# Allegro board CCR3_Slave_Bottom_Board_V1-0.brd
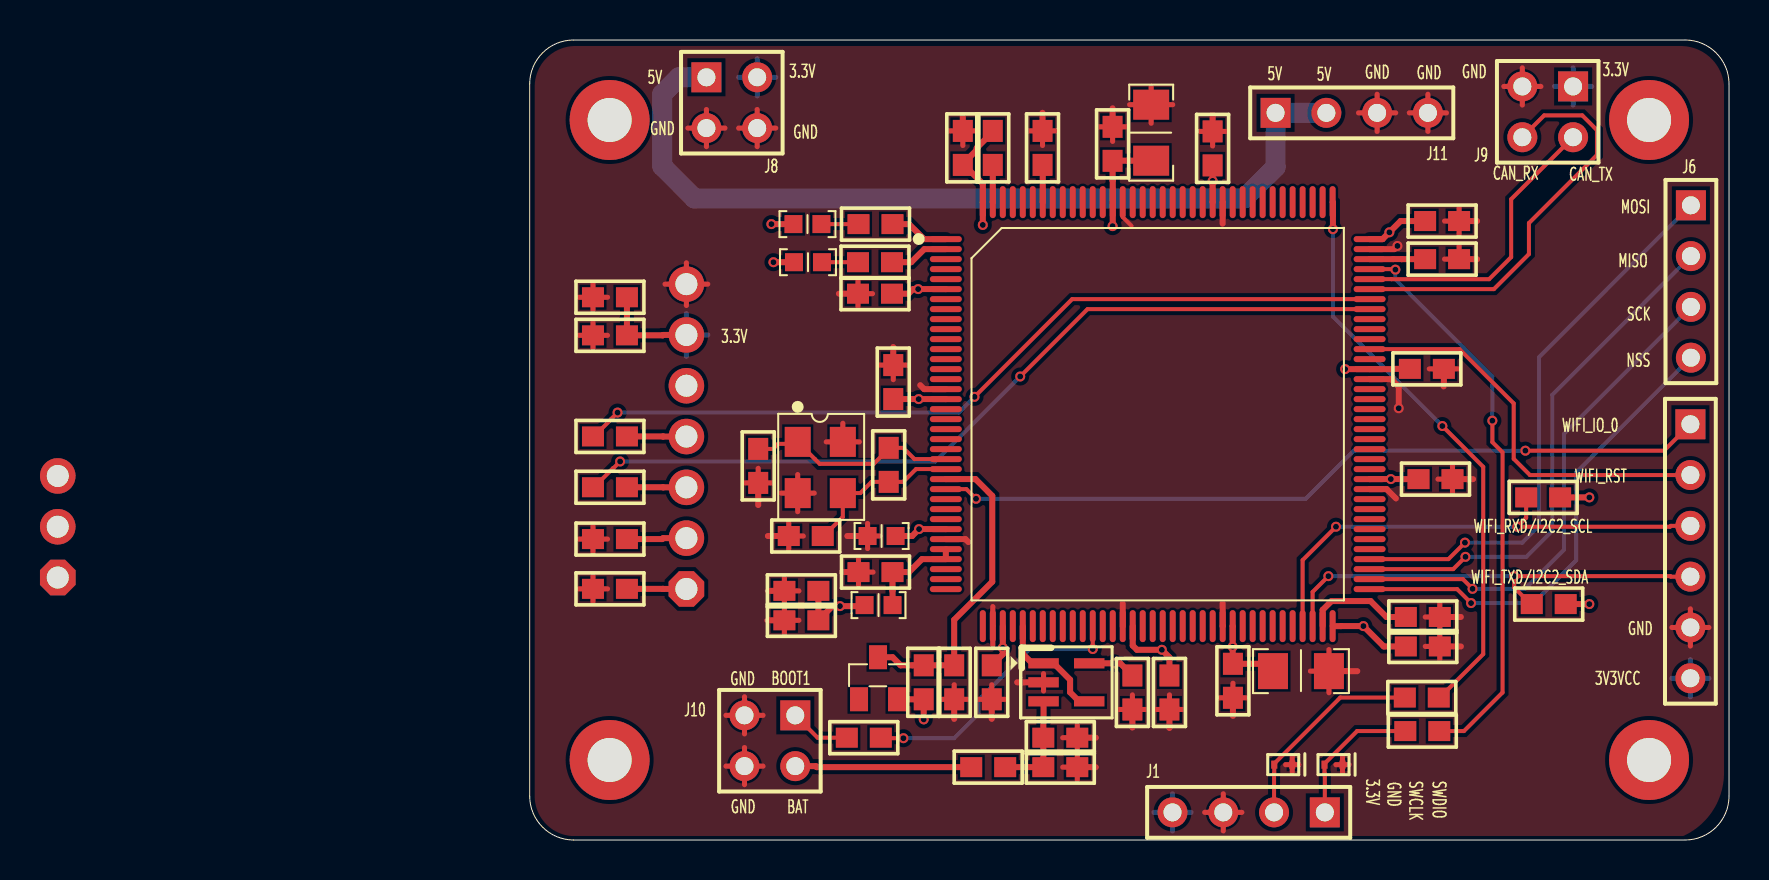
[diagram p0: board, top side]
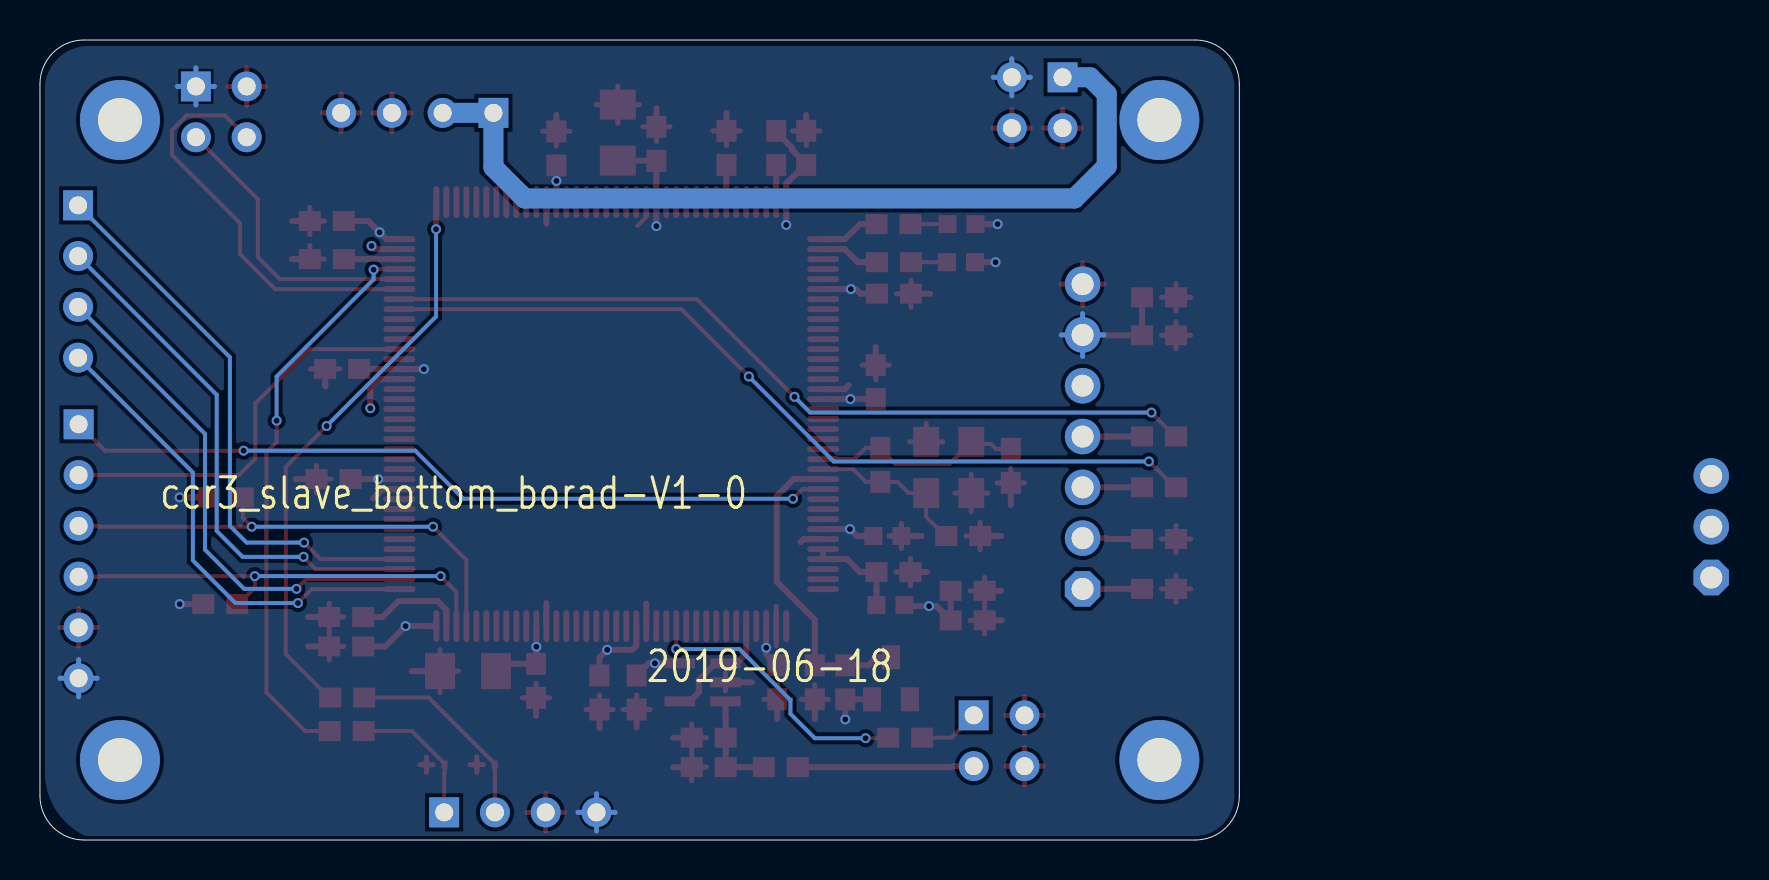
[diagram p1: board, bottom side, seen from below]

Outline 60 x 40 mm; copper layers: TOP, BOTTOM. Coordinates in mm from the lower left corner of the outline.
Outline path: 0,37.8 arc(0.64,39.36) 2.2,40 57.8,40 arc(59.36,39.36) 60,37.8 60,2.2 arc(59.36,0.64) 57.8,0 2.2,0 arc(0.64,0.64) 0,2.2 0,37.8

## Placement (name value [footprint] x y rotation side)
C1  100nF/50V  [C0603]  4.02 27.14 0 top
C2  10uF/25V  [C0603]  4.02 25.23 0 top
C3  270p/50V,10%  [C0603]  26.55 5.12 180 top
C18  10nF/16V  [C0603]  13.59 10.98 0 top
C19  2.2uF/16V  [C0603]  13.59 12.46 0 top
C25  10nF/16V  [C0603]  44.88 23.56 180 top
C26  10nF/16V  [C0603]  32.01 7.38 90 top
C27  10nF/16V  [C0603]  18.19 22.9 270 top
C28  100nF/16V  [C0603]  45.65 30.95 180 top
C29  100nF/16V  [C0603]  45.32 18.04 180 top
C30  100nF/16V  [C0603]  44.68 9.68 180 top
C31  100nF/16V  [C0603]  23.12 7.88 90 top
C32  100nF/16V  [C0603]  35.18 7.96 90 top
C33  100nF/16V  [C0603]  29.16 34.81 270 top
C34  100nF/16V  [C0603]  34.17 34.58 270 top
C35  100nF/16V  [C0603]  30.15 7.38 90 top
C36  10uF/25V  [RC1206]  39.99 8.44 180 top
C37  10uF/25V  [RC1206]  31.09 36.77 270 top
C38  10nF/16V  [RC0603]  16.9 15.2 0 top
C44  2.2uF/16V  [C0603]  21.24 7.88 90 top
C46  2.2uF/16V  [C0603]  21.67 34.61 270 top
C47  2.2uF/16V  [C0603]  44.68 11.15 180 top
C48  2.2uF/16V  [C0603]  45.65 29.04 180 top
C49  10nF/16V  [C0603]  17.3 13.4 0 top
C50  22p/50V  [C0603]  13.81 15.2 0 top
C52  22p/50V  [C0603]  11.43 18.7 90 top
C69  100nF/16V  [C0603]  17.27 27.32 0 top
D1  LED_Blue  [P0603]  13.2 30.8 0 top
D2  LED_Red  [P0603]  13.22 28.89 0 top
ED3  ESD7951ST5G  [SOD-923]  40.21 3.77 180 top
ED4  ESD7951ST5G  [SOD-923]  37.7 3.77 180 top
H1  Hole  [HOLE_2MM2]  4 36 0 top
H2  Hole  [HOLE_2MM2]  56 36 0 top
H3  Hole  [HOLE_2MM2]  4 4 0 top
H4  Hole  [HOLE_2MM2]  56 4 0 top
J1  Header  [HDR1X4]  39.78 1.38 180 top
J4  NC  [HDR1X6]  58.07 20.79 270 top
J6  NC  [HDR1X4]  58.09 31.73 270 top
J8  HEADER2x2  [HDR2X2]  8.84 38.14 0 top
J9  HEADER2x2  [HDR2X2]  52.2 37.68 270 top
J10  HEADER2x2  [HDR2X2]  13.29 6.23 270 top
J11  NC  [HDR1X4]  37.32 36.36 0 top
L1  BEAD  [RC0603]  18.15 11.75 180 top
R1  22R,5%  [R0603]  4.02 12.56 0 top
R2  22R,5%  [R0603]  4.02 15.05 0 top
R3  22R,5%  [R0603]  4.02 17.64 0 top
R4  22R,5%  [R0603]  4.02 20.18 0 top
R5  330K,1%  [R0603]  22.94 3.64 180 top
R6  30k,1%  [R0603]  26.55 3.64 180 top
R11  1k  [R0603]  25.66 34.61 270 top
R12  0  [R0603]  23.17 34.61 270 top
R13  1k  [R0603]  17.27 28.89 180 top
R46  22R,5%  [R0603]  44.66 5.45 180 top
R48  22R,5%  [R0603]  44.63 7.12 180 top
R81  NC/100k,5%  [R0603]  19.71 7.88 270 top
R100  1M,5%  [R0603]  17.96 18.76 90 top
R222  1k  [R0603]  17.3 30.8 180 top
R223  1k  [R0603]  50.98 11.8 0 top
R224  1k  [R0603]  50.7 17.13 0 top
R225  1k  [R0603]  16.72 5.12 180 top
U1  STM32F407ZET6  [TQFP-144]  20.81 30.05 0 top
U2  AD8541/AD  [SOT23-5_0R95]  26.85 7.88 270 top
V4  BAT54S,SOT-23  [SOT-23]  16.48 7.04 0 top
X3  NC  [E61-TTL]  7.84 12.55 180 top
Y1  8MHZ  [OSC-5X3]  13.41 19.91 270 top

## Library data of the parts
C1-C3 C18 C19 C25-C35 C44 C46-C50 C52 C69 = C: Tolerance: TOLERANCE; User Part Number: PARTNUM
C36-C38 = C
D1 D2 = LED2_1
ED3 ED4 = ESD7951ST5G_0
H1-H4 = Hole_0
J1 = Header 4_0
J4 = HEADER1x6
J6 J11 = HEADER1x4
J8-J10 = HEADER2x2
L1 = L
R1-R6 R11-R13 R46 R48 R81 R100 R222-R225 = R: Tolerance: TOLERANCE; User Part Number: PARTNUM
U1 = STM32F407ZET6_41
U2 = AD8541/AD_0
V4 = DIODE-DUAL_0
X3 = Header 7_0
Y1 = CRYSTAL1-4/SM_0

## Footprints (pads in the part's own frame, mm; a bottom-side part is the same pattern mirrored in y, then rotated)
C0603
  rect 1.1x1 smd: 1(-0.85,0) 2(0.85,0)
E61-TTL
  rrect 1.778x1.778 hole 1.102: 1(0,0) 10(31.45,-0.57)
  round 1.778 hole 1.102: 2(0,-2.54) 3(0,-5.08) 4(0,-7.62) 5(0,-10.16) 6(0,-12.7) 7(0,-15.24) 8(31.45,-5.65) 9(31.45,-3.11)
HDR1X4
  rect 1.5x1.5 hole 0.9: 1(0,0)
  round 1.5 hole 0.9: 2(2.54,0) 3(5.08,0) 4(7.62,0)
HDR1X6
  rect 1.5x1.5 hole 0.9: 1(0,0)
  round 1.5 hole 0.9: 2(2.54,0) 3(5.08,0) 4(7.62,0) 5(10.16,0) 6(12.7,0)
HDR2X2
  rect 1.5x1.5 hole 0.9: 1(0,0)
  round 1.5 hole 0.9: 2(2.54,0) 3(0,-2.54) 4(2.54,-2.54)
HOLE_2MM2
  round 4 hole 2.2: 1(0,0)
OSC-5X3
  rect 1.5x1.3 smd: 1(0,0) 2(2.563,0) 3(2.563,2.257) 4(0,2.257)
P0603
  rect 0.9x0.9 smd: 1(0,0) 2(1.4,0)
R0603
  rect 1.1x1 smd: 1(-0.85,0) 2(0.85,0)
RC0603
  rect 0.9x0.9 smd: 1(0,0) 2(1.4,0)
RC1206
  rect 1.5x1.8 smd: 1(0,0) 2(2.8,0)
SOD-923
  rect 0.305x0.406 smd: 1(-0.45,0) 2(0.45,0)
SOT23-5_0R95
  rect 0.508x1.524 smd: 1(-0.95,-1.143) 2(0,-1.143) 3(0.95,-1.143) 4(0.95,1.143) 5(-0.95,1.143)
SOT-23
  rect 0.9x1.2 smd: 1(0,0) 2(1.9,0) 3(0.95,2.1)
TQFP-144
  oval 1.6x0.3 smd: 1(0.006,-0.005) 2(0.006,-0.504) 3(0.006,-1.005) 4(0.006,-1.504) 5(0.006,-2.005) 6(0.006,-2.504) 7(0.006,-3.004) 8(0.006,-3.504) 9(0.006,-4.005) 10(0.006,-4.504) 11(0.006,-5.005) 12(0.006,-5.504) 13(0.006,-6.005) 14(0.006,-6.504) 15(0.006,-7.004) 16(0.006,-7.504) 17(0.006,-8.005) 18(0.006,-8.504) 19(0.006,-9.005) 20(0.006,-9.504) 21(0.006,-10.005) 22(0.006,-10.505) 23(0.006,-11.004) 24(0.006,-11.505) 25(0.006,-12.005) 26(0.006,-12.504) 27(0.006,-13.005) 28(0.006,-13.504) 29(0.006,-14.005) 30(0.006,-14.504) 31(0.006,-15.004) 32(0.006,-15.504) 33(0.006,-16.005) 34(0.006,-16.504) 35(0.006,-17.005) 36(0.006,-17.504) 73(21.206,-17.504) 74(21.206,-17.005) 75(21.206,-16.504) 76(21.206,-16.005) 77(21.206,-15.504) 78(21.206,-15.004) 79(21.206,-14.504) 80(21.206,-14.004) 81(21.206,-13.504) 82(21.206,-13.005) 83(21.206,-12.505) 84(21.206,-12.005) 85(21.206,-11.505) 86(21.206,-11.005) 87(21.206,-10.505) 88(21.206,-10.005) 89(21.206,-9.504) 90(21.206,-9.005) 91(21.206,-8.504) 92(21.206,-8.005) 93(21.206,-7.504) 94(21.206,-7.004) 95(21.206,-6.504) 96(21.206,-6.004) 97(21.206,-5.504) 98(21.206,-5.004) 99(21.206,-4.504) 100(21.206,-4.005) 101(21.206,-3.505) 102(21.206,-3.005) 103(21.206,-2.505) 104(21.206,-2.005) 105(21.206,-1.504) 106(21.206,-1.005) 107(21.206,-0.504) 108(21.206,-0.005)
  oval 0.3x1.6 smd: 37(1.856,-19.355) 38(2.356,-19.355) 39(2.856,-19.355) 40(3.356,-19.355) 41(3.856,-19.355) 42(4.356,-19.355) 43(4.856,-19.355) 44(5.356,-19.355) 45(5.856,-19.355) 46(6.356,-19.355) 49(7.856,-19.355) 50(8.356,-19.355) 51(8.856,-19.355) 52(9.356,-19.355) 53(9.856,-19.355) 54(10.356,-19.355) 55(10.856,-19.355) 56(11.356,-19.355) 57(11.856,-19.355) 58(12.356,-19.355) 59(12.856,-19.355) 60(13.356,-19.355) 61(13.856,-19.355) 62(14.356,-19.355) 63(14.856,-19.355) 64(15.356,-19.355) 65(15.856,-19.355) 66(16.356,-19.355) 67(16.856,-19.355) 68(17.356,-19.355) 69(17.856,-19.355) 70(18.356,-19.355) 71(18.856,-19.355) 72(19.356,-19.355) 109(19.356,1.846) 110(18.856,1.846) 111(18.356,1.846) 114(16.856,1.846) 115(16.356,1.846) 116(15.856,1.846) 117(15.356,1.846) 118(14.856,1.846) 119(14.356,1.846) 120(13.856,1.846) 121(13.356,1.846) 122(12.856,1.846) 123(12.356,1.846) 124(11.856,1.846) 125(11.356,1.846) 126(10.856,1.846) 127(10.356,1.846) 128(9.856,1.846) 129(9.356,1.846) 130(8.856,1.846) 131(8.356,1.846) 132(7.856,1.846) 133(7.356,1.846) 134(6.856,1.846) 135(6.356,1.846) 136(5.856,1.846) 137(5.356,1.846) 138(4.856,1.846) 139(4.356,1.846) 140(3.856,1.846) 141(3.356,1.846) 142(2.856,1.846) 143(2.356,1.846) 144(1.856,1.846)
  oval 0.295x1.6 smd: 47(6.856,-19.355) 48(7.356,-19.355) 112(17.856,1.846) 113(17.356,1.846)

## Nets
3V3VCC: C1.2 C2.2 C18.2 C19.2 C25.2 C26.2 C27.2 C28.2 C29.2 C30.2 C31.2 C32.2 C33.2 C34.2 C35.2 C36.2 C37.2 C38.2 C46.2 C69.2 D1.1(A) D2.1(A) J1.4 J4.6 J8.2 J9.1 L1.2 R12.1 R81.2 R223.2 R224.2 U1.6(VBAT) U1.17(VDD) U1.30(VDD1) U1.39(VDD3) U1.52(VDD5) U1.62(VDD7) U1.72(VDD8) U1.84(VDD10) U1.95(VDD12) U1.108(VDD14) U1.121(VDD16) U1.131(VDD18) U1.144(VDD19) U2.5(V+) V4.2(K2) X3.6
3V3VCC2: C49.2 L1.1 U1.32(VREF+) U1.33(VDDA)
5VCC: J8.1 J11.1 J11.2
GND: C1.1 C2.1 C3.1 C18.1 C19.1 C25.1 C26.1 C27.1 C28.1 C29.1 C30.1 C31.1 C32.1 C33.1 C34.1 C35.1 C36.1 C37.1 C38.1 C44.1 C46.1 C47.1 C48.1 C49.1 C50.1 C52.1 C69.1 ED3.1(CATHODE) ED4.1(CATHODE) J1.3 J4.5 J8.3 J8.4 J9.3 J10.3 J10.4 J11.3 J11.4 R1.1 R2.1 R6.1 R11.1 U1.16(VSS) U1.31(VSSA) U1.38(VSS2) U1.51(VSS4) U1.61(VSS6) U1.83(VSS9) U1.94(VSS11) U1.107(VSS13) U1.120(VSS15) U1.130(VSS17) U2.2(V-) X3.7 Y1.2 Y1.4
ADCIN: U1.41(PA5/SPI1_SCK/OTG_HS_ULPI_CK/TIM) U2.1(OUT) U2.4(-)
BATTERY: J10.2 R5.2
BOOT1: J10.1 R225.2
CAN1_RX_MCU: J9.4 U1.103(PA11/TIM1_CH4/U1_CTS/CAN1_RX/OT)
CAN1_TX_MCU: J9.2 U1.104(PA12/TIM1_ETR/U1_RTS/CAN1_TX/OT)
LED_RED: R13.1 U1.2(PE3/TRACED0/FSMC_A19)
LED_YELLOW: R222.1 U1.1(PE2/TRACECLK/FSMC_A23/ETH_MII_T)
MCU_RXD1: R4.1 U1.102(PA10/TIM1_CH3/U1_RX/OTG_FS_ID/D)
MCU_TXD1: R3.1 U1.101(PA9/TIM1_CH2/U1_TX/I2C3_SMBA/OT)
OSC_IN: C52.2 R100.2 U1.23(PH0-OSC_IN) Y1.1
OSC_OUT: C50.2 R100.1 U1.24(PH1-OSC_OUT) Y1.3
SPI2_MISO: J6.2 U1.75(PB14/SPI2_MISO/TIM1_CH2N/TIM8_C)
SPI2_MOSI: J6.1 U1.76(PB15/SPI2_MOSI/TIM1_CH3N/TIM8_C)
SPI2_NSS: J6.4 U1.73(PB12/SPI2_NSS/TIM1_BKIN/U3_CK/C)
SPI2_SCK: J6.3 U1.74(PB13/SPI2_SCK/TIM1_CH1N/U3_CTS/)
SWCLK: ED4.2(ANODE) J1.2 R48.2
SWDIO: ED3.2(ANODE) J1.1 R46.2
WIFI_IO_0: J4.1 U1.26(PC0/OTG_HS_ULPI_STP/ADC123_IN10)
WIFI_RST: J4.2 U1.97(PC7/TIM3_CH2/TIM8_CH2/U6_RX/SDI)
WIFI_RXD/I2C2_SCL: J4.3 R224.1 U1.69(PB10/SPI2_SCK/TIM2_CH3/U3_TX/I2)
WIFI_TXD/I2C2_SDA: J4.4 R223.1 U1.70(PB11/TIM2_CH4/U3_RX/I2C2_SDA/HS)
N129645: R11.2 U1.138(BOOT0)
N129675: C47.2 U1.71(VCAP_1)
N129677: C48.2 U1.106(VCAP_2)
N129683: R12.2 U1.143(PDR_ON)
N129705: C44.2 R81.1 U1.25(NRST) V4.3(A)
N129939: R46.1 U1.105(PA13/JTMS_SWDIO)
N129941: R48.1 U1.109(PA14/JTCK_SWCLK)
N2309681: D1.2(K) R222.2
N2310001: D2.2(K) R13.2
N6070723: C3.2 R5.1 R6.2 U2.3(+)
N6361088: R1.2 X3.1
N6361092: R2.2 X3.2
N6361144: R3.2 X3.3
N6361148: R4.2 X3.4
N6363821: R225.1 U1.48(PB2/BOOT1)

Pads without a net: H1 1; H2 1; H3 1; H4 1; U1 3 4 5 7 8 9 10 11 12 13 14 15 18 19 20 21 22 27 28 29 34 35 36 37 40 42 43 44 45 46 47 49 50 53 54 55 56 57 58 59 60 63 64 65 66 67 68 77 78 79 80 81 82 85 86 87 88 89 90 91 92 93 96 98 99 100 110 111 112 113 114 115 116 117 118 119 122 123 124 125 126 127 128 129 132 133 134 135 136 137 139 140 141 142; V4 1; X3 5 8 9 10

## Via types
v1: diameter 0.5, hole 0.3, TOP to BOTTOM, 42 vias

## Routing (per net, layer and track width the routed paths; a pad name or vN(x,y) marks a point on that pad's centre or on a via; arc(x,y) is an arc through that point)
3V3VCC: length 81.6
  TOP w0.3: C30.2 42.73,9.68 v1(41.71,10.7) 40.6,10.7 40.6,10.69 U1.72 ; D2.1 v1(12.19,28.89) ; v1(19.71,6.03) R81.2 18.38,7.03 V4.2 ; C36.2 36.82,8.81 C32.2 35.17,8.82 v1(35.17,9.66) U1.62 ; R224.2 v1(53.01,17.13) ; C31.2 23.67,9.29 v1(23.67,9.61) U1.39 ; X3.6 6.67,25.25 6.65,25.23 C2.2 C1.2 ; v1(29.16,30.69) 29.16,30.72 29.17,30.73 U1.131 29.17,32.97 29.16,32.98 C33.2 29.17,33.97 C37.2 ; U1.17 20.82,22.05 v1(19.46,22.05) 18.19,22.05 C27.2 ; C35.2 29.54,8.83 v1(29.24,8.83) U2.5 ; L1.2 16.7,11.69 v1(15.52,11.69) 15.15,11.69 C18.2 C19.2 ; U1.121 34.17,31.9 v1(34.17,32.95) C34.2 ; U1.84 v1(43.08,18.05) 43.64,18.05 43.64,18.04 C29.2 ; C69.2 18.95,27.32 19.18,27.55 v1(19.43,27.55) 20.82,27.55 U1.6 ; D1.1 v1(12.09,30.8) ; v1(40.79,23.54) U1.95 43.2,23.54 43.21,23.56 C25.2 ; U1.30 20.82,15.55 v1(19.48,15.55) 19.13,15.2 C38.2 ; U1.108 42.67,30.04 v1(43.01,30.38) 43.57,30.95 C28.2 ; R223.2 v1(53.01,11.8) ; v1(22.67,30.75) U1.144 22.67,32.81 21.73,33.76 C46.2 21.67,33.8 22.36,34.5 22.36,34.6 23.17,35.41 R12.1 ; U1.52 30.17,9.72 30.38,9.51 v1(31.63,9.51) 32.01,9.13 C26.2
  BOTTOM w0.254: 10.45,38.14 J8.2 ; J8.2 11.38,39.06 ; J8.2 11.38,37.21 ; J8.2 12.31,38.14 ; 6.77,25.25 X3.6 ; X3.6 8.91,25.25 ; X3.6 7.84,24.19 ; X3.6 7.84,26.32 ; J9.1 53.13,37.68 ; J9.1 52.2,38.61 ; J9.1 51.27,37.68 ; J9.1 52.2,36.75 ; 32.16,0.45 J1.4 ; J1.4 31.23,1.38 ; J1.4 32.16,2.31 ; J1.4 33.09,1.38 ; J4.6 59,8.09 ; J4.6 58.07,7.16 ; J4.6 57.14,8.09 ; J4.6 58.07,9.02
3V3VCC2: length 5.1
  TOP w0.3: U1.32 U1.33 19.63,14.04 18.98,13.4 C49.2 18.15,12.47 18.15,12.47 L1.1
5VCC: length 43.4
  BOTTOM w1: J8.1 7.46,38.14 6.63,37.3 6.63,33.69 8.25,32.08 35.75,32.08 37.32,33.64 J11.1 J11.2
GND: length 158.3
  TOP w0.2: U1.130 29.67,31.15 30.11,30.7
  TOP w0.254: J1.3 34.7,2.31 ; J1.3 34.7,0.45 ; J1.3 35.63,1.38 ; J1.3 33.77,1.38 ; 31.33,6.53 C26.1 ; C26.1 32.01,7.25 ; C26.1 32.68,6.53 ; C36.1 40.91,8.44 ; C36.1 39.06,8.44 ; C36.1 39.99,9.52 ; C36.1 39.99,7.37 ; R2.1 3.89,15.05 ; R2.1 3.17,15.73 ; R2.1 2.44,15.05 ; R2.1 3.17,14.37 ; J4.5 59,10.63 ; J4.5 58.07,11.56 ; J4.5 58.07,9.7 ; J4.5 57.14,10.63 ; C37.1 32.17,36.77 ; C37.1 31.09,37.7 ; C37.1 31.09,35.84 ; C37.1 30.01,36.77 ; 44.8,11.15 C47.1 ; C47.1 45.53,11.83 ; C47.1 45.53,10.47 ; 24.98,35.45 R11.1 ; R11.1 26.33,35.45 ; R11.1 25.66,34.73 ; 9.82,6.23 J10.3 ; J10.3 11.67,6.23 ; J10.3 10.75,7.16 ; J10.3 10.75,5.31 ; 29.47,6.53 C35.1 ; C35.1 30.15,7.25 ; C35.1 30.83,6.53 ; C27.1 18.87,23.75 ; C27.1 18.19,23.02 ; C27.1 17.51,23.75 ; C31.1 23.12,7.76 ; C31.1 22.44,7.03 ; C31.1 23.79,7.03 ; 23.17,9.72 U1.38 23.17,11.67 ; C52.1 12.11,17.85 ; C52.1 10.75,17.85 ; C52.1 11.43,18.58 ; 44.94,35.43 J11.4 ; J11.4 44.94,37.29 ; J11.4 44.01,36.36 ; J11.4 45.86,36.36 ; 20.99,35.45 C46.1 ; C46.1 21.67,34.73 ; C46.1 22.35,35.45 ; ED4.1 38.15,4.15 ; ED4.1 38.15,3.39 ; ED4.1 38.48,3.77 ; ED4.1 37.82,3.77 ; 3.17,26.46 C1.1 ; C1.1 3.17,27.82 ; C1.1 3.89,27.14 ; C1.1 2.44,27.14 ; C28.1 46.5,31.63 ; C28.1 46.5,30.27 ; C28.1 45.77,30.95 ; X3.7 8.91,27.79 ; X3.7 7.84,28.86 ; X3.7 6.77,27.79 ; X3.7 7.84,26.73 ; 46.5,29.72 C48.1 45.77,29.04 ; J9.3 50.59,37.68 ; J9.3 49.66,36.75 ; J9.3 48.73,37.68 ; J9.3 49.66,38.61 ; 13.41,16.42 Y1.2 ; Y1.2 12.58,17.34 ; Y1.2 14.24,17.34 ; Y1.2 13.41,18.27 ; 2.44,12.56 R1.1 ; R1.1 3.89,12.56 ; R1.1 3.17,11.88 ; R1.1 3.17,13.24 ; 11.38,34.67 J8.4 ; J8.4 11.38,36.52 ; J8.4 12.31,35.6 ; J8.4 10.45,35.6 ; 12.74,11.78 C19.1 ; C19.1 13.47,12.46 ; C19.1 12.74,13.13 ; C34.1 34.84,35.43 ; C34.1 34.17,34.7 ; C34.1 33.49,35.43 ; 46.46,23.56 C25.1 45.01,23.56 ; 10.75,2.77 J10.4 ; J10.4 11.67,3.69 ; J10.4 9.82,3.69 ; J10.4 10.75,4.62 ; 34.5,7.11 C32.1 ; C32.1 35.18,7.84 ; C32.1 35.86,7.11 ; 16.45,12.72 C49.1 ; C49.1 16.45,14.07 ; C49.1 17.18,13.4 ; C18.1 13.47,10.98 ; C18.1 12.74,10.31 ; C18.1 12.74,11.66 ; R6.1 27.4,4.32 ; R6.1 27.4,2.96 ; R6.1 26.67,3.64 ; J8.3 8.84,36.52 ; J8.3 8.84,34.67 ; J8.3 9.77,35.6 ; J8.3 7.91,35.6 ; C38.1 17.53,15.2 ; C38.1 16.9,14.57 ; C38.1 16.9,15.83 ; 42.4,35.43 J11.3 ; J11.3 43.32,36.36 ; J11.3 41.47,36.36 ; J11.3 42.4,37.29 ; 40.33,3.77 ED3.1 ; ED3.1 40.99,3.77 ; ED3.1 40.66,3.39 ; ED3.1 40.66,4.15 ; C2.1 3.17,25.91 ; C2.1 3.89,25.23 ; C2.1 2.44,25.23 ; C2.1 3.17,24.55 ; 45.53,9 C30.1 ; C30.1 44.8,9.68 ; C30.1 45.53,10.36 ; 46.17,17.37 C29.1 ; C29.1 45.44,18.04 ; C29.1 46.17,18.72 ; 25.71,7.45 U2.2 25.71,8.32 ; 14.84,19.91 Y1.4 ; Y1.4 16.49,19.91 ; Y1.4 15.67,20.84 ; 26.67,5.12 C3.1 ; C3.1 27.4,4.44 ; C3.1 27.4,5.79 ; 28.48,35.66 C33.1 ; C33.1 29.16,34.93 ; C33.1 29.84,35.66 ; C50.1 12.96,15.88 ; C50.1 12.96,14.52 ; C50.1 13.69,15.2 ; 16.42,26.64 C69.1 ; C69.1 16.42,27.99 ; C69.1 17.15,27.32 ; C44.1 21.91,7.03 ; C44.1 21.24,7.76 ; C44.1 20.56,7.03
  TOP w0.3: U1.83 42.87,17.54 43.33,17.08 ; C28.1 47.4,30.95 ; C3.1 28.32,5.12 ; C27.1 18.19,24.65 ; U1.94 43.1,23.04 43.48,22.67 v1(43.48,21.59) ; R6.1 28.32,3.64 ; 21.95,14.89 21.8,15.04 U1.31 ; C69.1 15.47,27.32 ; C25.1 45.73,22.81 45.72,22.79 45.72,22.68 ; C46.1 21.67,36.26 ; R11.1 25.66,36.36 ; C34.1 34.17,36.26 ; U1.107 43.25,29.54 v1(43.41,29.7) ; C18.1 11.89,10.98 ; C26.1 32.01,5.6 ; C48.1 47.4,29.04 ; C30.1 46.59,9.68 ; C31.1 23.12,6.06 ; C32.1 35.18,6.21 ; U1.16 19.73,22.54 19.54,22.74 ; 41.4,8.44 C36.1 ; U2.2 24.39,7.88 ; 15.89,15.2 C38.1 ; C50.1 11.92,15.2 ; C47.1 46.59,11.15 ; U1.120 34.67,30.82 ; 34.67,11.84 34.67,10.69 U1.61 ; C33.1 29.16,36.59 ; 29.67,11.82 U1.51 ; C52.1 11.43,16.75 ; C49.1 15.62,13.4 ; C44.1 21.24,6.06 ; C19.1 11.92,12.46 ; C29.1 47.2,18.04 ; C35.1 30.15,5.62
ADCIN: length 6.1
  TOP w0.3: U1.41 24.67,9.3 25.14,8.83 U2.1 26.22,8.83 27.04,8.01 27.04,7.38 27.49,6.93 U2.4
BATTERY: length 8.8
  TOP w0.3: R5.2 14.36,3.64 14.31,3.69 J10.2
BOOT1: length 3
  TOP w0.2: R225.2 14.4,5.12 J10.1
CAN1_RX_MCU: length 20.8
  TOP w0.2: J9.4 50.75,36.23 52.66,36.23 53.39,35.49 53.39,34.25 49.99,30.85 49.99,29.3 48.24,27.54 U1.103
CAN1_TX_MCU: length 14.8
  TOP w0.2: J9.2 49.1,32.04 49.1,29.14 48,28.04 43.11,28.04 43.11,28.04 U1.104
LED_RED: length 3
  TOP w0.3: R13.1 19.09,28.89 19.74,29.54 U1.2
LED_YELLOW: length 3
  TOP w0.3: R222.1 18.98,30.8 19.73,30.04 U1.1
MCU_RXD1: length 41.7
  TOP w0.2: R4.1 3.22,20.18 4.06,21.02 4.06,21.03 v1(4.4,21.37) ; v1(22.25,22.16) 27.14,27.04 U1.102
  BOTTOM w0.2: v1(4.4,21.37) 21.47,21.37 v1(22.25,22.16)
MCU_TXD1: length 42.5
  TOP w0.2: v1(24.54,23.18) 27.91,26.54 U1.101 ; v1(4.52,18.93) 4.19,18.59 4.17,18.59 3.22,17.64 R3.1
  BOTTOM w0.2: v1(24.54,23.18) 20.29,18.93 v1(4.52,18.93)
OSC_IN: length 10.6
  TOP w0.2: U1.23 20.82,19.05 19.25,19.05 18.69,19.61 R100.2 17.96,19.56 17.21,18.81 14.51,18.81 Y1.1 13.31,19.81 12.43,19.81 12.18,19.55 C52.2
OSC_OUT: length 8.2
  TOP w0.2: 15.67,17.35 16.54,17.35 17.1,17.91 R100.1 18.69,17.91 19.33,18.55 20.82,18.55 U1.24 ; 15.67,17.35 15.66,17.35 15.66,16.15 14.71,15.2 C50.2 ; 15.67,17.35 Y1.3
SPI2_MISO: length 26.5
  TOP w0.2: U1.75 46.2,13.54 v1(46.81,14.16)
  BOTTOM w0.2: v1(46.81,14.16) 49.86,14.16 51.16,15.45 51.16,22.26 J6.2
SPI2_MOSI: length 28.3
  TOP w0.2: U1.76 45.96,14.04 v1(46.79,14.87)
  BOTTOM w0.2: v1(46.79,14.87) 49.66,14.87 50.5,15.71 50.5,24.14 J6.1
SPI2_NSS: length 24
  TOP w0.2: v1(47.09,11.85) 46.4,12.54 U1.73
  BOTTOM w0.2: J6.4 52.35,18.37 52.35,13.98 50.22,11.85 v1(47.09,11.85)
SPI2_SCK: length 25.5
  TOP w0.2: U1.74 46.68,13.04 v1(47.17,12.56)
  BOTTOM w0.2: J6.3 51.74,20.3 51.74,14.51 49.79,12.56 v1(47.17,12.56)
SWCLK: length 10.3
  TOP w0.2: J1.2 37.24,3.33 37.25,3.34 ED4.2 37.25,3.82 40.55,7.12 R48.2
SWDIO: length 7.2
  TOP w0.2: J1.1 39.78,3.32 39.76,3.34 ED3.2 39.76,3.82 41.39,5.45 R46.2
WIFI_IO_0: length 39
  TOP w0.2: v1(22.33,17.06) 21.85,17.54 U1.26 ; v1(49.81,19.47) 56.75,19.47 J4.1
  BOTTOM w0.2: v1(49.81,19.47) 41.23,19.47 38.82,17.06 v1(22.33,17.06)
WIFI_RST: length 20.3
  TOP w0.2: U1.97 46.51,24.54 49.23,21.83 49.23,19.06 50.04,18.25 J4.2
WIFI_RXD/I2C2_SCL: length 25.1
  TOP w0.2: J4.3 57.09,15.71 57.05,15.66 v1(49.41,15.66) 49.85,16.11 R224.1 ; U1.69 38.67,14 v1(40.34,15.66)
  BOTTOM w0.2: v1(40.34,15.66) v1(49.41,15.66)
WIFI_TXD/I2C2_SDA: length 22.7
  TOP w0.2: U1.70 39.17,12.4 v1(39.96,13.19) ; R223.1 50.08,11.8 49.25,12.62 v1(49.25,13.19) 57.06,13.19 57.09,13.17 J4.4
  BOTTOM w0.2: v1(39.96,13.19) v1(49.25,13.19)
N129645: length 1.9
  TOP w0.3: U1.138 25.67,33.74 R11.2
N129675: length 5.5
  TOP w0.3: C47.2 42.86,11.15 42.06,11.95 40.11,11.95 39.67,11.5 U1.71
N129677: length 2.8
  TOP w0.3: U1.106 43.21,29.04 43.62,29.05 43.62,29.04 C48.2
N129683: length 1.9
  TOP w0.3: U1.143 23.17,33.75 R12.2
N129705: length 15.9
  TOP w0.3: U1.25 22.3,18.05 23.14,17.21 23.14,12.91 21.24,11.01 C44.2 R81.1 18.56,8.73 18.15,9.14 V4.3
N129939: length 28.6
  TOP w0.2: R46.1 46.74,5.45 48.67,7.38 48.67,19.38 48.16,19.89 v1(48.16,20.97) ; v1(43.31,28.52) 43.28,28.54 U1.105
  BOTTOM w0.2: v1(48.16,20.97) 48.16,23.18 43.31,28.03 v1(43.31,28.52)
N129941: length 28.8
  TOP w0.2: v1(45.66,20.7) 47.7,18.65 47.7,9.3 45.53,7.12 R48.1
  TOP w0.3: v1(40.19,30.54) 40.19,31.88 U1.109
  BOTTOM w0.2: v1(40.19,30.54) 40.19,26.17 v1(45.66,20.7)
N2309681: length 1.9
  TOP w0.2: R222.2 D1.2
N2310001: length 1.8
  TOP w0.2: R13.2 D2.2
N6070723: length 5.2
  TOP w0.3: R5.1 R6.2 C3.2 25.7,6.1 25.71,6.11 U2.3
N6361088: length 3
  TOP w0.3: X3.1 6.67,12.55 6.67,12.56 R1.2
N6361092: length 3
  TOP w0.3: R2.2 6.63,15.05 6.67,15.09 X3.2
N6361144: length 3
  TOP w0.3: R3.2 6.67,17.64 6.67,17.63 X3.3
N6361148: length 3
  TOP w0.3: R4.2 6.67,20.18 6.67,20.17 X3.4
N6363821: length 14
  TOP w0.2: U1.48 v1(28.17,9.55) ; R225.1 17.59,5.09 v1(18.7,5.09)
  BOTTOM w0.2: v1(18.7,5.09) 21.24,5.09 22.46,6.31 22.46,7 25.01,9.55 v1(28.17,9.55)

## Copper pours and planes (outline as drawn; the poured copper is in the pictures)
3V3VCC on BOTTOM: 2.11,0.2 0.79,0.83 0.25,2.19 0.25,37.7 0.86,39.12 2.29,39.7 57.58,39.7 59.05,39.13 59.75,37.73 59.75,3.36 59.2,1.48 57.71,0.2 ; 1 cut-out
GND on TOP: 2.11,0.2 0.79,0.83 0.25,2.19 0.25,37.7 0.86,39.12 2.29,39.7 57.58,39.7 59.05,39.13 59.75,37.73 59.75,3.36 59.2,1.48 57.71,0.2 ; 3 cut-outs

## Text on the board
Ref Des/Silkscreen Bottom: 2019-06-18 | ccr3_slave_bottom_borad-V1-0
User.Comments: SWDIO
Ref Des/Silkscreen Top: 5V | GND | 3.3V | BOOT1 | BAT | WIFI_TXD/I2C2_SDA | WIFI_RXD/I2C2_SCL | CAN_RX | WIFI_IO_0 | CAN_TX | WIFI_RST | 3V3VCC | MISO | MOSI | NSS | SCK | SWCLK | SWDIO
User.37: FIGURE | SIZE | 0.3 | 0.8999 | 1.1016 | 2.2 | DRILL CHART: TOP to BOTTOM | ALL UNITS ARE IN MILLIMETERS | TOLERANCE | +0.0/-0.0 | +0.0762/-0.0762 | PLATED | QTY | 42 | 24 | 5 | 1 | 10 | 4
